# Altium PCB PCB1.PcbDoc
Units mil, origin at the board's own origin, x right, y up, seen from the top; angles counter-clockwise.
Board outline 1259.84 x 1574.8 mil, 2 copper layers (Top Layer, Bottom Layer); 39 components, 30 nets, 136 pads, 135 vias.
Unrouted connection lines stored in the file: 1.
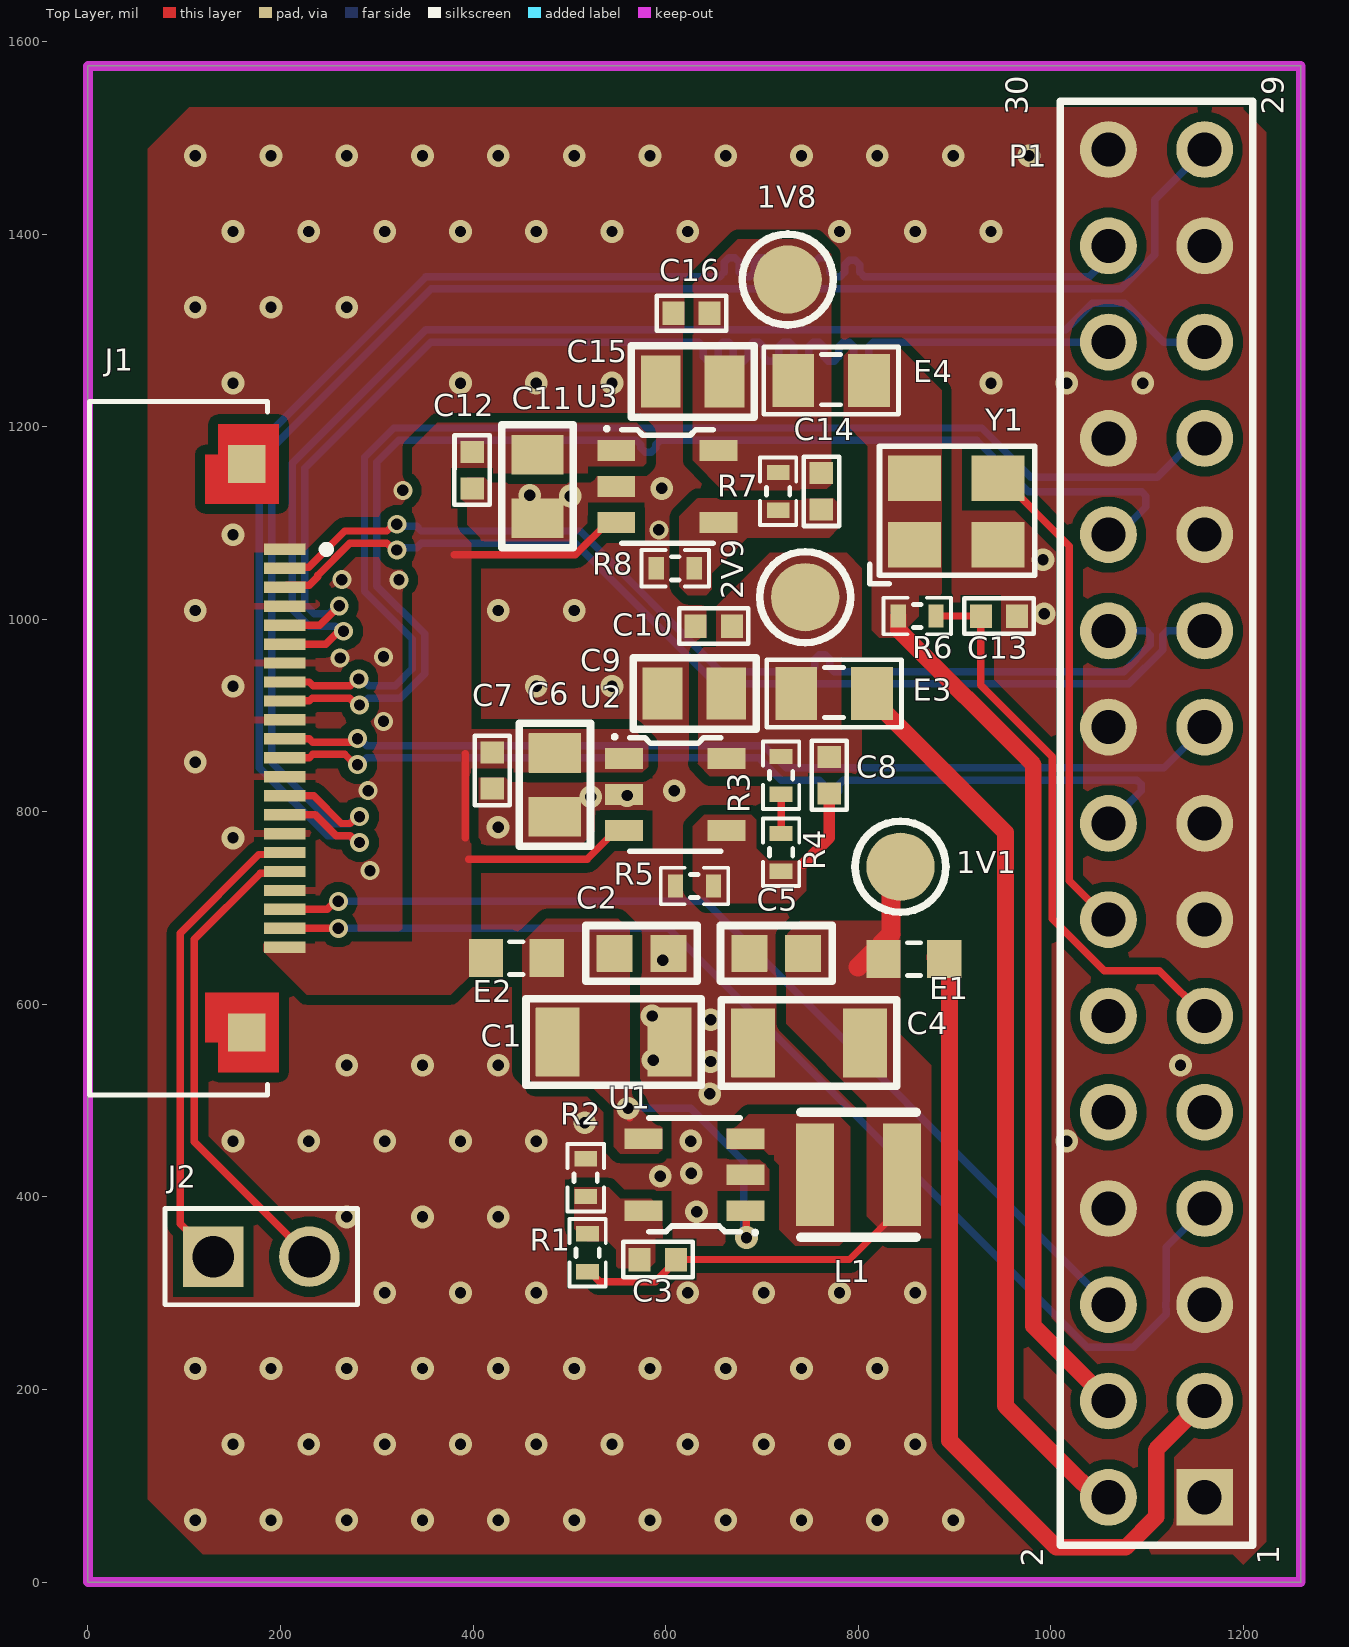
[diagram p0: Top Layer view]
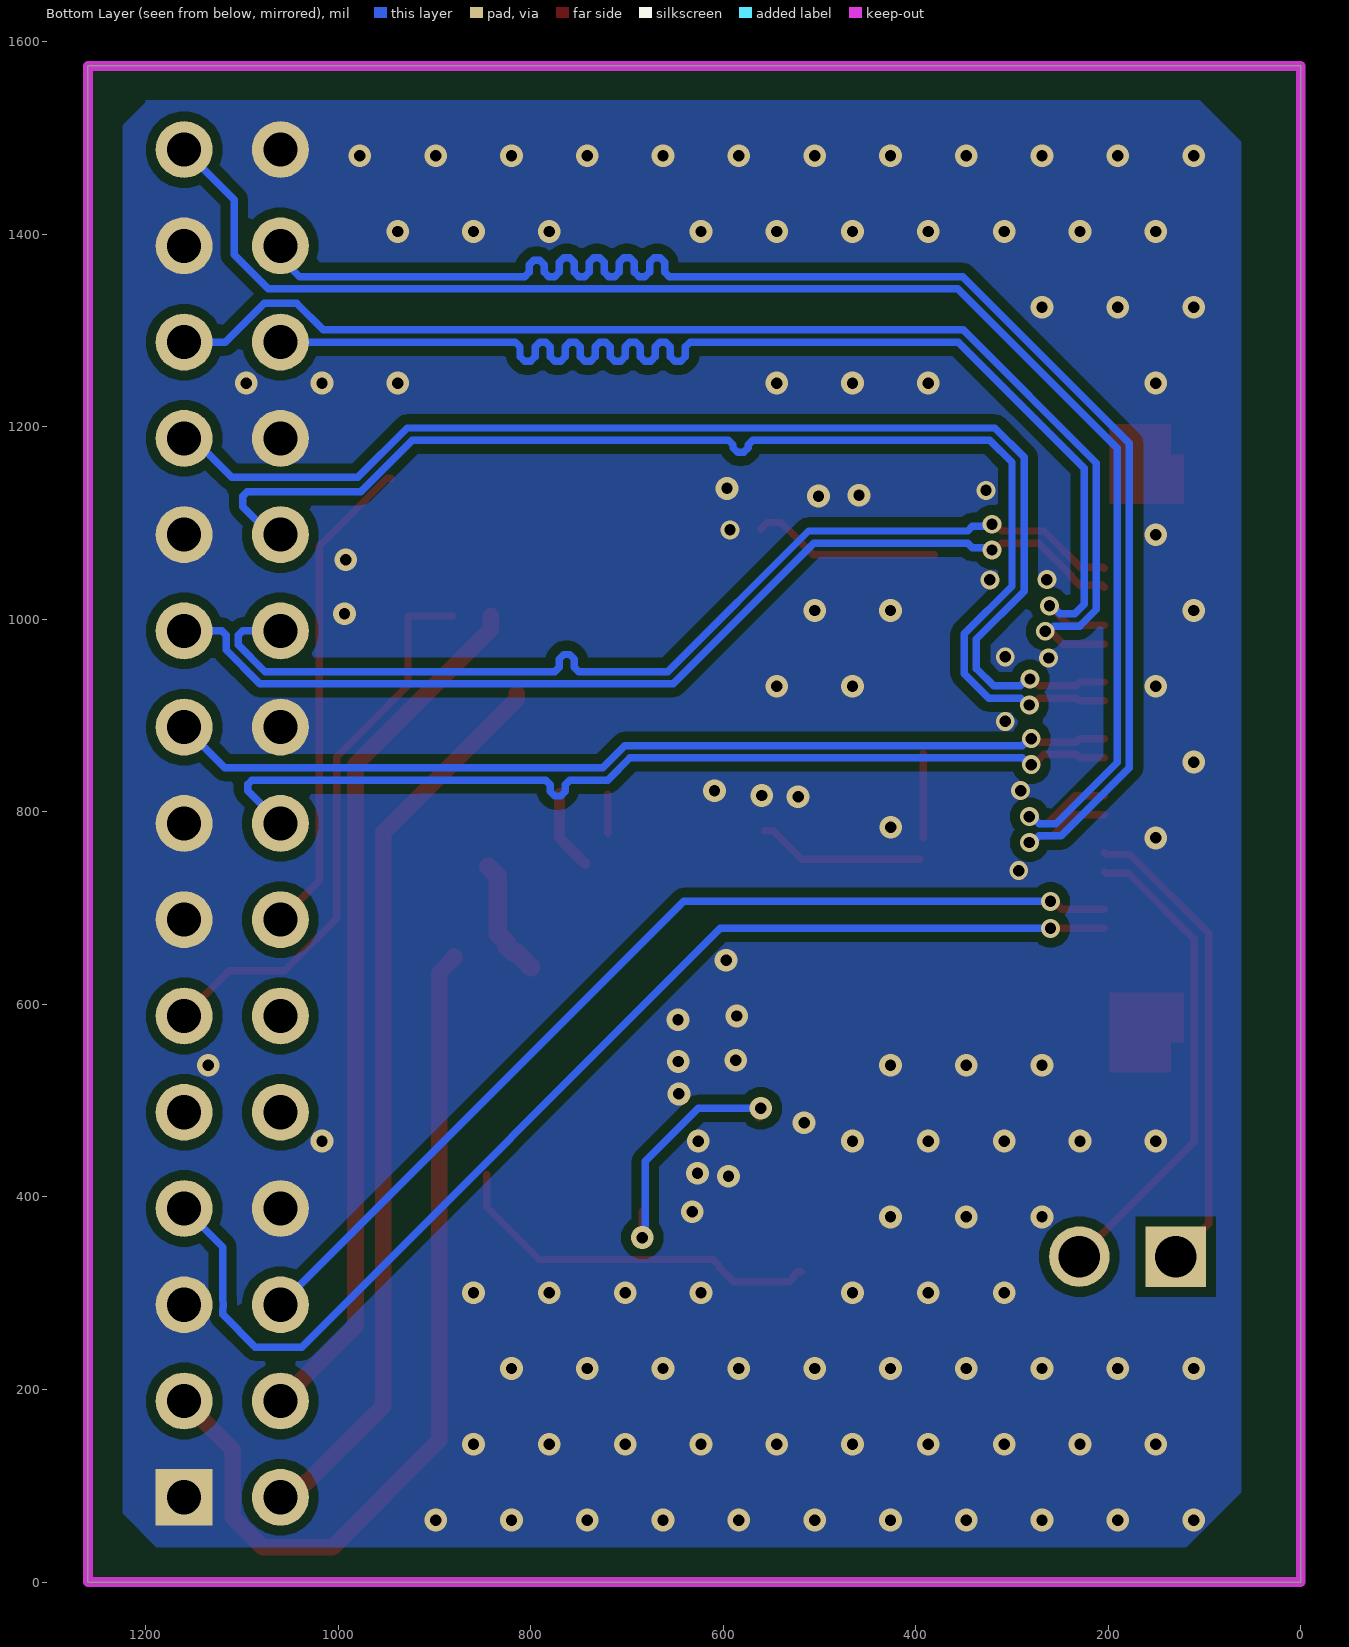
[diagram p1: Bottom Layer view, seen from below]
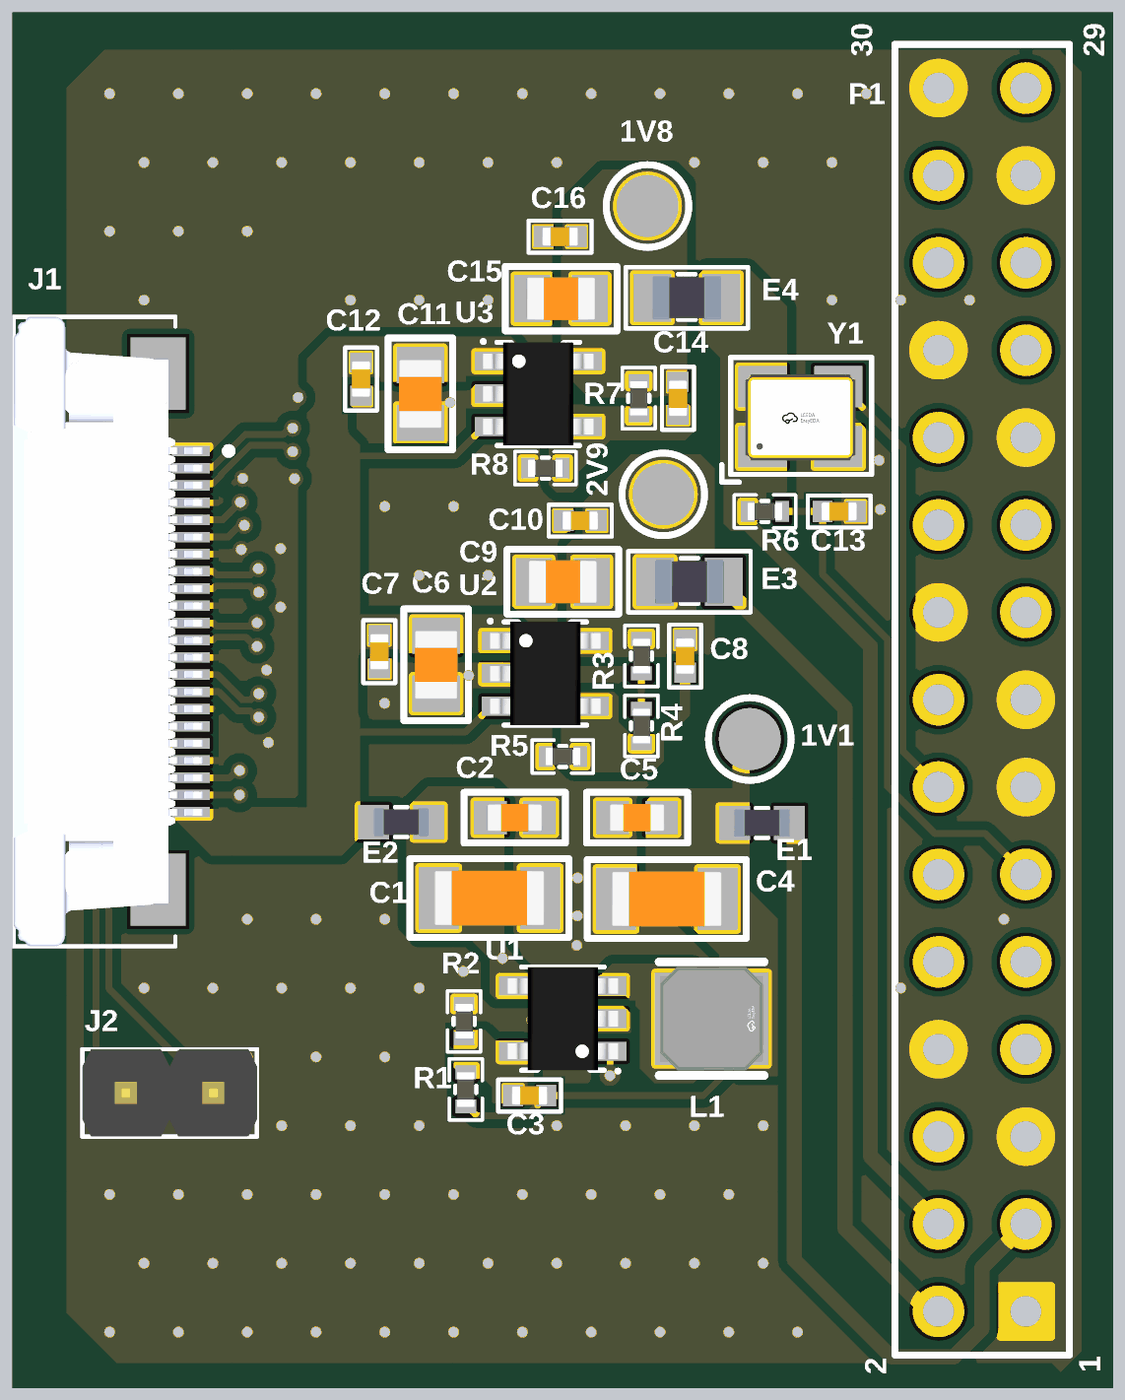
[diagram p2: 3D render of the assembled board from above, using the file's embedded part models]

## Layer stack, top to bottom
Top Solder: solder mask 0.4, Solder Resist, Dk 3.5
Top Layer: signal copper 1.4
Dielectric 1: dielectric 12.6, FR-4, Dk 4.8
Bottom Layer: signal copper 1.4
Bottom Solder: solder mask 0.4, Solder Resist, Dk 3.5

## Board outline
0,0 0,1574.8 1259.84,1574.8 1259.84,0

## Design rules (kind name [scope] priority, off if disabled: settings)
Clearance POLY [InPolygon] p1: gap=10 ignorepadtopadclearanceinfootprint=FALSE
Clearance [All] p2: gap=7.09 ignorepadtopadclearanceinfootprint=FALSE except(4.72: Arc-Arc Arc-Track Track-Track)
DiffPairsRouting [InDifferentialPairClass('MDC')] p1: maxlimit=5 minlimit=5 mostfreqgap=5 toplayer_minwidth=7.75 toplayer_maxwidth=7.75 toplayer_prefwidth=7.75 bottomlayer_minwidth=7.75 bottomlayer_maxwidth=7.75 bottomlayer_prefwidth=7.75 impedanceprofiledriven=TRUE impedanceprofileid={84AA8ECF-859C-4DF6-84D2-6CB03C06FCF8} impedanceprofilevalue=100.000000 maxuncoupledlength=500
MatchedLengths [InDifferentialPairClass('MDC')] p1: tolerance=9.84 checknetsindiffpair=TRUE checkdiffpairvsdiffpair=FALSE checkxsignals=FALSE checkothers=FALSE
MinimumSolderMaskSliver [All] p1: minsoldermaskwidth=0.39
PolygonConnect [All] p1: connectstyle=Direct reliefconductorwidth=10 reliefentries=4 polygonreliefangle="90 Angle" airgapwidth=10
RoutingVias [All] p1: holewidth=28 width=50 viastyle="Through Hole" minholewidth=28 minwidth=50 maxholewidth=28 maxwidth=50
SilkToSilkClearance [All] p1: silktosilkclearance=0.39
SilkToSolderMaskClearance [IsPad] p1: minsilkscreentomaskgap=0.39 clearancetoexposedcopper=TRUE
SolderMaskExpansion [All] p1: expansion=4 istentingtop=FALSE
Width [InNet('No Net') And OnLayer('Top Layer')] p1: maxlimit=196.85 minlimit=10 preferedwidth=12.04 bottomlayer_prefwidth=12.04 minimp=50.000000 maximp=50.000000 favimp=50.000000
26 further rules are at their usual default settings.

## Classes and differential pairs
net class 100R: MC_N MC_P MD1_N MD1_P MD2_N MD2_P MD3_N MD3_P MD4_N MD4_P
differential pair class MDC: MC MD1 MD2 MD3 MD4
differential pair MD4: +MD4_P -MD4_N
differential pair MD3: +MD3_P -MD3_N
differential pair MC: +MC_P -MC_N
differential pair MD2: +MD2_P -MD2_N
differential pair MD1: +MD1_P -MD1_N

## Components (designator, comment, footprint, x,y, rotation, side; value= is the part's Value field where it differs from the comment)
1V1 "TP" TP-SMD 844,743 r0 top
1V8 "TP" TP-SMD 726.93,1353 r90 top
2V9 "TP" TP-SMD 745,1023 r0 top
C1 "10uF 50V" CAPC_1206_N 545,563 r180 top
C2 "100nF" CAPC_0603_N 575,653 r180 top
C3 "22pF-50V" C0402 592,335 r0 top
C4 "10uF 50V" CAPC_1206_N 750,558 r0 top
C5 "100nF" CAPC_0603_N 715,653 r0 top
C6 "10uF - 16V" CAPC_0805_N 485,828 r90 top
C7 "100nF/4/16V" C0402 420,843 r90 top
C8 "100nF/4/16V" C0402 770,838 r90 top
C9 "10uF - 16V" CAPC_0805_N 630,923 r0 top
C10 "100nF/4/16V" C0402 650,993 r0 top
C11 "10uF - 16V" CAPC_0805_N 466.93,1138 r90 top
C12 "100nF/4/16V" C0402 399,1155 r90 top
C13 "100nF/4/16V" C0402 946.31,1003.45 r180 top
C14 "100nF/4/16V" C0402 761.93,1133 r90 top
C15 "10uF - 16V" CAPC_0805_N 628,1247 r0 top
C16 "100nF/4/16V" C0402 626.93,1318 r0 top
E1 "5A" 0603 858,647 r0 top
E2 "5A" 0603 445,648 r180 top
E3 "1K-1.5A" 0805 775,923 r0 top
E4 "1K-1.5A" 0805 771.93,1248 r0 top
J1 "F32Q-1A7H1-11022" AMPHENOL_F32Q-1A7H1-11022 94,866 r270 top
J2 "2P" JUMP-2.54-2PIN-M-TH 130,338 r0 top
L1 "2.2uH 2A" IND-3x3 755,423 r0 top
P1 "Header 15X2" HDR2X15 1160,88 r90 top
R1 "8.45K/4/1%" R0402 519,342 r90 top
R2 "10K/4/1%" R0402 517,420 r90 top
R3 "118K/4/1%" R0402 720,838 r270 top
R4 "100K/4/1%" R0402 720,758 r270 top
R5 "51.1K/4/1%" R0402 630,723 r180 top
R6 "10K/4/1%" R0402 861.31,1003.45 r0 top
R7 "226k/4/1%" R0402 716.93,1133 r270 top
R8 "100K/4/1%" R0402 610,1053 r180 top
U1 "ETA3409S2F" SOT-23-5 630,423 r180 top
U2 "TLV75801PDBVR" SOT-23-5 610,818 r0 top
U3 "TLV75801PDBVR" SOT-23-5 601.93,1138 r0 top
Y1 "24Mhz" SMD3225-4P 900,1113 r0 top

## Footprints (in the part's own frame and the unit in brackets; to place one, negate y for a bottom-side part, rotate by r counter-clockwise, add the part's x,y. Pads: shape width x height; smd on the part's side, far side on the other; paste and mask are expansions set on the pad)
0603 [mm]
  rect 0.9x1 smd: 1(-0.8,0) 2(0.8,0)
  silkscreen extent -0.18,-0.43 0.18,0.43, body extent -0.8,-0.4 0.8,0.4, height 0.8
0805 [mm]
  rect 1.1x1.397 smd: 1(-1,0) 2(1,0)
  silkscreen extent -1.78,-0.89 1.78,0.89, body extent -1,-0.63 1,0.62, height 0.85
AMPHENOL_F32Q-1A7H1-11022 [mm]
  rect 0.3x1.1 smd: 1(-5.25,2.8) 2(-4.75,2.8) 3(-4.25,2.8) 4(-3.75,2.8) 5(-3.25,2.8) 6(-2.75,2.8) 7(-2.25,2.8) 8(-1.75,2.8) 9(-1.25,2.8) 10(-0.75,2.8) 11(-0.25,2.8) 12(0.25,2.8) 13(0.75,2.8) 14(1.25,2.8) 15(1.75,2.8) 16(2.25,2.8) 17(2.75,2.8) 18(3.25,2.8) 19(3.75,2.8) 20(4.25,2.8) 21(4.75,2.8) 22(5.25,2.8)
  rect 1x1 smd paste-1 mask+0: SH1(-7.5,1.8) SH2(7.5,1.8)
  Top Layer region: -6.45,0.7 -7.75,0.7 -7.75,1.05 -8.55,1.05 -8.55,2.65 -6.45,2.65
  Top Layer region: 8.55,1.05 7.75,1.05 7.75,0.7 6.45,0.7 6.45,2.65 8.55,2.65
  silkscreen extent -9.15,-2.35 9.15,4, body extent -9.15,-2.35 9.15,3.15, height 2.05
C0402 [mm]
  rect 0.58x0.62 smd mask+0.05: 1(-0.48,0) 2(0.48,0)
  silkscreen extent -0.92,-0.47 0.91,0.47, body extent -0.53,-0.28 0.53,0.28, height 0.55
CAPC_0603_N [mm]
  rrect2% 0.95x0.97 smd: 1(-0.71,0) 2(0.71,0)
  silkscreen extent -1.47,-0.74 1.47,0.74, body extent -0.8,-0.4 0.8,0.4, height 0.8
CAPC_0805_N [mm]
  rrect2% 1.05x1.38 smd: 1(-0.84,0) 2(0.84,0)
  silkscreen extent -1.62,-0.94 1.63,0.94, body extent -1,-0.62 1,0.63, height 0.95
CAPC_1206_N [mm]
  rrect2% 1.16x1.82 smd: 1(-1.5,0.051) 2(1.45,0.051)
  silkscreen extent -2.34,-1.09 2.29,1.19, body extent -1.63,-0.75 1.57,0.85, height 1.15
HDR2X15 [mm] "Connector; Header; 15x2 Position"
  rect 1.5x1.5 hole 0.9: 1(0,0)
  round 1.5 hole 0.9: 2(0,2.54) 3(2.54,0) 4(2.54,2.54) 5(5.08,0) 6(5.08,2.54) 7(7.62,0) 8(7.62,2.54) 9(10.16,0) 10(10.16,2.54) 11(12.7,0) 12(12.7,2.54) 13(15.24,0) 14(15.24,2.54) 15(17.78,0) 16(17.78,2.54) 17(20.32,0) 18(20.32,2.54) 19(22.86,0) 20(22.86,2.54) 21(25.4,0) 22(25.4,2.54) 23(27.94,0) 24(27.94,2.54) 25(30.48,0) 26(30.48,2.54) 27(33.02,0) 28(33.02,2.54) 29(35.56,0) 30(35.56,2.54)
  silkscreen extent -1.27,-1.27 36.83,3.81
IND-3x3 [mm]
  rect 1x2.7 smd: 1(0,0) 2(2.3,0)
  silkscreen extent -0.37,-1.65 2.67,1.65, body extent -0.35,-1.5 2.65,1.5, height 1.51
JUMP-2.54-2PIN-M-TH [mm] "2 pins, 1 row, straight, gold plating"
  rect 1.6x1.6 hole 1.1: 1(0,0)
  round 1.6 hole 1.1: 2(2.54,0)
  silkscreen extent -1.27,-1.27 3.81,1.27, body extent -1.27,-1.27 3.81,1.27, height 8.54
R0402 [mm]
  rect 0.4x0.6 smd: 1(-0.5,0) 2(0.5,0)
  silkscreen extent -0.89,-0.48 0.89,0.48, body extent -0.5,-0.25 0.5,0.25, height 0.36
SMD3225-4P [mm]
  rect 1.4x1.2 smd: 1(-1.049,-0.901) 2(1.151,-0.901) 3(1.151,0.85) 4(-1.049,0.85)
  silkscreen extent -2.24,-1.93 2.12,1.7, body extent -1.55,-1.3 1.65,1.2, height 0.81
SOT-23-5 [mm]
  rect 1x0.55 smd: 1(-1.35,0.95) 2(-1.35,0) 3(-1.35,-0.95) 4(1.35,-0.95) 5(1.35,0.95)
  silkscreen extent -1.65,-1.5 1.2,1.57, body extent -1.6,-1.5 1.6,1.5, height 0.92
TP-SMD [mm] "Test Point SMD"
  round 1.8 smd: 1(0,0)
  silkscreen extent -1.2,-1.2 1.2,1.2

## Part data
C1 C4: library part TCC1206X5R106K500HT, "10uF ±10% 50V Ceramic Capacitor X5R 1206", Manufacture=CCTC, Tolerance=±10%, Category=Capacitor, Detailed Value="10uF 50V", Mounting type=SMD, Partnumber=TCC1206X5R106K500HT
C2 C5: library part CC0603KRX7R9BB104, "50V 100nF X7R ±10% 0603 Multilayer Ceramic Capacitors MLCC - SMD/SMT ROHS", Manufacture=Yageo, Tolerance=±10%, Category=Capacitor, Creator=Hainv, Detailed Value=100nF, Mounting type=SMD, Partnumber=CC0603KRX7R9BB104, Supplier=LCSC
C3: library part CC0402JRNPO9BN220, "22pF ±5% 50V Ceramic Capacitor NP0 0402", Manufacture=Yageo, Category=Capacitor, Creator=Hainv, Detailed Value=22pF-50V, Mounting type=SMD, Partnumber=CC0402JRNPO9BN220, Supplier=LCSC
C6 C9 C11 C15: library part C0805X5R106K160NT, "CAP CER 10uF 16V X5R 0805", Detailed Value="10uF - 16V - 0805", Manufacture=Hottech, Category=Capacitor, Creator=ThangND, Mounting type=SMD, Partnumber=C0805X5R106K160NT, PROJECT=KHO
C7 C8 C10 C12 C13 C14 C16: library part CC0402KRX7R7BB104, "16V 100nF X7R ±10% 0402 Multilayer Ceramic Capacitors MLCC - SMD/SMT ROHS", Manufacture=Yageo, Tolerance=±10%, Category=Capacitor, Creator=Hainv, Detailed Value=100nF/4/16V, Mounting type=SMD, Partnumber=CC0402KRX7R7BB104, Supplier=LCSC
E1 E2: library part YI160808U100-5R0T, "10mΩ ±25% 10Ω@100MHz 0603 Ferrite Beads and Chips RoHS", Manufacture=YJYCOIN, Category="Ferrite Bead", Creator=Hainv, Detailed Value=5A, Mounting type=SMD, Partnumber=YI160808U100-5R0T, Supplier=LCSC
E3 E4: library part UPZ2012E102-1R5TF, "FERRITE BEAD 1 KOHM 0805 1.5A", Manufacture=Sunlord, Category="Ferrite Bead", Creator=Tunn, Detailed Value=1K-1.5A, Mounting type=SMD, Partnumber=UPZ2012E102-1R5TF
J1: "Flex Connector, 0.50mm Pitch, Height 2.00mm, Right angle, Slider type, ZIF, Upper contact, 22 position , Without MYLAR", Package=None, Check_prices=https://www.snapeda.com/parts/F32Q-1A7H1-11022/Amphenol+FCI/view-part/?ref=eda, MF="Amphenol ICC (FCI)", MP=F32Q-1A7H1-11022, SnapEDA_Link=https://www.snapeda.com/parts/F32Q-1A7H1-11022/Amphenol+FCI/view-part/?ref=snap
J2: library part X6521WV-2x01H-C60D30, "2P 2x1P Gold Brass -40℃~+105℃ Pin Header Black 2.54mm 2.5mm 250V 2 3A 2.54mm Through Hole,P=2.54mm Headers, Male Pins RoHS", Manufacture="XKB Connection", Category=Connector, Creator=Hainv, Detailed Value=2P, Mounting type=TH, Partnumber=X6521WV-2x01H-C60D30, Supplier=LCSC
L1: library part ZNR3015ST2R2M, "2A 2.2uH Magnetic Shielded Inductor ±20% 2A 60mΩ SMD,3x3mm Fixed Inductors RoHS", Manufacture=ZE, Category=Inductor, Creator=Hainv, Detailed Value="2.2uH 2A", Mounting type=SMD, Partnumber=ZNR3015ST2R2M, Supplier=LCSC
P1: "Header, 15-Pin, Dual row", LatestRevisionDate=17-Jul-2002, LatestRevisionNote="Re-released for DXP Platform.", Publisher="Altium Limited"
R1: library part RC0402FR-078K45L, "62.5mW 8.45kΩ 50V Thick Film Resistor ±100ppm/℃ ±1% 0402 Chip Resistor - Surface Mount RoHS", Manufacture=Yageo, Category=Resistor, Creator=Hainv, Detailed Value=8.45K/4/1%, Mounting type=SMD, Partnumber=RC0402FR-078K45L, Supplier=LCSC
R2 R6: library part RC0402FR-0710KL, "62.5mW Thick Film Resistor 50V ±100ppm/℃ ±1% 10kΩ 0402 Chip Resistor - Surface Mount ROHS", Manufacture=Yageo, Tolerance=±1%, Category=Resistor, Creator=Hainv, Detailed Value=10K/4/1%, Mounting type=SMD, Partnumber=RC0402FR-0710KL, Supplier=LCSC
R3: library part RC0402DR-07118KL, "62.5mW 118kΩ 50V Thick Film Resistor ±100ppm/℃ ±0.5% 0402 Chip Resistor - Surface Mount RoHS", Manufacture=Yageo, Category=Resistor, Creator=Hainv, Detailed Value=118K/4/1%, Mounting type=SMD, Partnumber=RC0402DR-07118KL, Supplier=LCSC
R4 R8: library part RC0402FR-07100KL, "62.5mW Thick Film Resistor 50V ±100ppm/℃ ±1% 100kΩ 0402 Chip Resistor - Surface Mount ROHS", Manufacture=Yageo, Tolerance=±1%, Category=Resistor, Creator=Hainv, Detailed Value=100K/4/1%, Mounting type=SMD, Partnumber=RC0402FR-07100KL, Supplier=LCSC
R5: library part RC0402FR-0751K1L, "51.1kΩ 62.5mW 50V Thick Film Resistor ±100ppm/℃ ±1% 0402 Chip Resistor - Surface Mount RoHS", Manufacture=Yageo, Category=Resistor, Creator=Hainv, Detailed Value=51.1K/4/1%, Mounting type=SMD, Partnumber=RC0402FR-0751K1L, Supplier=LCSC
R7: library part AC0402FR-07226KL, "226kΩ 62.5mW 50V Thick Film Resistor ±100ppm/℃ ±1% 0402 Chip Resistor - Surface Mount RoHS", Detailed Value=226K/4/1%, Manufacture=Yageo, Category=Resistor, Creator=Hainv, Mounting type=SMD, Partnumber=AC0402FR-07226KL, Supplier=LCSC
U1: "Buck 1MHz Adjustable 600mV~7.3V 3A SOT23-5 Voltage Regulators - DC DC Switching Regulators RoHS", Manufacture=etasolution, Category=IC, Creator=Hainv, Detailed Value=ETA3409S2F, Mounting type=SMD, Partnumber=ETA3409S2F, Supplier=LCSC
U2 U3: "500mA, low IQ, high precision, adjustable ultra-low dropout voltage regulator with enable function", Manufacture=TI, Category=IC, Creator=Hainv, Detailed Value=TLV75801PDBVR, Mounting type=SMD, Partnumber=TLV75801PDBVR, Supplier=LCSC
Y1: library part 1631-24003-BTKEYA, "1.8V 10mA ±30ppm CMOS 24MHz SMD3225-4P Crystal Oscillators ROHS", Manufacture=Interquip, Category=Crystal, Creator=Hainv, Detailed Value=24Mhz, Mounting type=SMD, Partnumber=1631-24003-BTKEYA, Supplier=LCSC
1V1 1V8 2V9: Category=Connector, Creator=Quyen.nv, Detailed Value=TP, Partnumber=TP

## Via types
v1: diameter 23.62, hole 11.81, Top Layer to Bottom Layer, tented top, 92 vias
v2: diameter 23.62, hole 11.81, Top Layer to Bottom Layer, tented both sides, 22 vias
v3: diameter 19.68, hole 11.81, Top Layer to Bottom Layer, tented both sides, 21 vias

## Nets (pads, with @x,y where several pads share a name; then routed paths per layer and width w, separated by ;. In a path a pad name is that pad's centre, name@x,y a point inside that pad or via, vN(x,y) a via of type N, cw(c..) or ccw(c..) an arc to the next point about the centre after c; other vN are vias at no path point)
+1V1: E1.2 P1.3 | length 924.4
  Top Layer w17.32: E1.2@879.5,650 879.5,648.03 895,632.53 895,147 1006,36 1078,36 1109.55,67.55 1109.55,137.55 P1.3
+1V8: E4.2 P1.4 R6.1 Y1.1 Y1.4 | length 905.9
  Top Layer w17.32: R6.1 841.62,989.38 982,849 982,266 P1.4
+2V9: E3.2 P1.2 | length 943.8
  Top Layer w17.32: E3.2 814.37,917.15 953,778.52 953,183 1032.07,103.93 1032.78,103.93 1048.71,88 P1.2
+3V3: C6.2 C7.2 C11.2 C12.2 E2.2 J1.22 U2.1 U2.3 U3.1 U3.3 | length 458.2
  Top Layer w7.75: 380.5,1067 506.32,1067 539.92,1100.6 U3.3 554.05,1100.6 U3.3@561,1093.65 ; 392,772.91 392,860.5 ; 395.75,751 518.39,751 547.99,780.6 U2.3
GND: C1.1 C2.1 C4.1 C5.1 C6.1 C7.1 C9.1 C10.1 C11.1 C12.1 C13.1 C15.1 C16.1 J1.1 J1.4 J1.7 J1.10 J1.13 J1.16 J1.19 P1.1 P1.5 P1.8 P1.13 P1.15 P1.18 P1.21 P1.24 P1.27 P1.30 R2.2 R5.2 R8.2 U1.2 U2.2 U3.2 Y1.2
  other v1: 111.31,64.29 190.05,64.29 268.79,64.29 347.53,64.29 426.27,64.29 505.01,64.29 583.75,64.29 662.49,64.29 741.23,64.29 819.97,64.29 898.71,64.29 150.68,143.03 229.42,143.03 308.16,143.03 386.9,143.03 465.64,143.03 544.38,143.03 623.12,143.03 701.86,143.03 780.6,143.03 859.34,143.03 111.31,221.77 190.05,221.77 268.79,221.77 347.53,221.77 426.27,221.77 505.01,221.77 583.75,221.77 662.49,221.77 741.23,221.77 819.97,221.77 308.16,300.51 386.9,300.51 465.64,300.51 623.12,300.51 701.86,300.51 780.6,300.51 859.34,300.51 268.79,379.26 347.53,379.26 426.27,379.26 150.68,458 229.42,458 308.16,458 386.9,458 465.64,458 1016.82,458 268.79,536.74 347.53,536.74 426.27,536.74 1134.93,536.74 150.68,772.96 111.31,851.7 150.68,930.44 465.64,930.44 544.38,930.44 111.31,1009.18 426.27,1009.18 505.01,1009.18 150.68,1087.92 150.68,1245.4 386.9,1245.4 465.64,1245.4 544.38,1245.4 938.08,1245.4 1016.82,1245.4 1095.56,1245.4 111.31,1324.14 190.05,1324.14 268.79,1324.14 150.68,1402.88 229.42,1402.88 308.16,1402.88 386.9,1402.88 465.64,1402.88 544.38,1402.88 623.12,1402.88 780.6,1402.88 859.34,1402.88 938.08,1402.88 111.31,1481.62 190.05,1481.62 268.79,1481.62 347.53,1481.62 426.27,1481.62 505.01,1481.62 583.75,1481.62 662.49,1481.62 741.23,1481.62 819.97,1481.62 898.71,1481.62 977.45,1481.62
  other v2: 632.22,384.75 594.45,421.47 626.72,424.68 626,458 516,477 646,507 646.72,540.68 587,542 647,584 586,588 597,646 426,784 522.19,815.84 560,817 609,822 993.36,1005.68 992,1062 501,1128 459,1129 596,1136
  other v3: 293,739 291,822 307,894 261.98,959.84 307,961 263.73,1041.27 323,1041 593,1093 327,1134
MC_N: J1.8 P1.23 | length 1311.2
  Top Layer w7.75: J1.8 229.77,934.9 233.76,930.9 272.48,930.9 279.63,938.06 v3(281.37,938.06)
  Bottom Layer w7.75: v3(281.37,938.06) 284.37,938.06 291.52,930.9 319,930.9 337,948.9 337,979.54 287.25,1029.29 287.25,1168.28 317.72,1198.75 928.28,1198.75 979.52,1147.51 1017.78,1147.51 1110.51,1147.51 1151,1188 P1.23
MC_P: J1.9 P1.22 | length 1311.3
  Top Layer w7.75: J1.9 229.77,915.21 232.71,918.15 271.85,918.15 279,911 v3(282,911)
  Bottom Layer w7.75: v3(282,911) 283.73,911 290.89,918.15 324.28,918.15 349.75,943.62 349.75,984.82 300,1034.58 300,1163 323,1186 550,1186 569.5,1186 574.19,1181.31 574.19,1178.41 578.88,1173.73 585.13,1173.73 589.82,1178.41 589.82,1181.31 594.5,1186 663,1186 923,1186 976.52,1132.48 1094.46,1132.48 1099,1127.94 1099,1117 1070,1088 P1.22
MCLK: P1.14 Y1.3 | length 508.3
  Top Layer w7.75: Y1.3 949.25,1146.45 1019.51,1076.18 1019.51,728.49 P1.14
MD1_N: J1.2 P1.20 | length 1073.2
  Top Layer w7.75: J1.2 205.46,1054.24 229.24,1054.24 266.76,1091.76 310.57,1091.76 317.58,1098.77 v3(320.81,1098.77)
  Bottom Layer w7.75: v3(320.81,1098.77) 323.09,1096.49 341.43,1096.49 346.15,1091.76 511.38,1091.76 657.39,945.75 746.19,945.75 750.07,945.75 754.76,950.44 754.76,958.79 759.44,963.48 765.7,963.48 770.38,958.79 770.38,950.44 775.07,945.75 847,945.75 885.81,945.75 1075.96,945.75 1103.62,973.42 1103.62,983.46 1099.08,988 P1.20
MD1_P: J1.3 P1.19 | length 1073.5
  Top Layer w7.75: J1.3 206.27,1035.35 229.64,1035.35 238.61,1044.32 238.61,1045.57 272.04,1079.01 310.57,1079.01 317.58,1072 v3(320.81,1072)
  Bottom Layer w7.75: v3(320.81,1072) 323.09,1074.28 341.43,1074.28 346.15,1079.01 506.09,1079.01 652.1,933 835,933 1081.24,933 1116.38,968.14 1116.38,983.46 1120.92,988 P1.19
MD2_N: J1.5 P1.26 | length 1309.4
  Top Layer w7.75: J1.5 240.95,993.95 v3(261,1014)
  Bottom Layer w7.75: v3(261,1014) 258.69,1014 250.49,1005.8 234.93,1005.8 225,1015.73 225,1157 356,1288 615,1288 634.5,1288 639.19,1283.31 639.19,1273 643.88,1268.32 650.13,1268.32 654.82,1273 654.82,1283.31 659.5,1288 665.76,1288 670.44,1283.31 670.44,1273 675.13,1268.32 681.38,1268.32 686.07,1273 686.07,1283.31 690.76,1288 697.01,1288 701.7,1283.31 701.7,1273 706.38,1268.32 712.63,1268.32 717.32,1273 717.32,1283.31 722.01,1288 728.26,1288 732.95,1283.31 732.95,1273 737.64,1268.32 743.89,1268.32 748.57,1273 748.57,1283.31 753.26,1288 759.51,1288 764.2,1283.31 764.2,1273 768.89,1268.32 775.14,1268.32 779.83,1273 779.83,1283.31 784.52,1288 790.77,1288 795.45,1283.31 795.45,1273 800.14,1268.32 806.39,1268.32 811.08,1273 811.08,1283.31 815.77,1288 868,1288 P1.26
MD2_P: J1.6 P1.25 | length 1314.7
  Top Layer w7.75: J1.6 246.98,974.27 260.32,987.61 v3(265.48,987.61)
  Bottom Layer w7.75: v3(265.48,987.61) 262.25,987.61 256.81,993.05 229.64,993.05 212.25,1010.45 212.25,1162.28 350.72,1300.75 1015.49,1300.75 1043.23,1328.49 1076.77,1328.49 1117.26,1288 P1.25
MD3_N: J1.11 P1.17 | length 988.7
  Top Layer w7.75: J1.11 229.77,875.84 233.23,872.38 276.38,872.38 v3(280,876)
  Bottom Layer w7.75: v3(280,876) 282.42,876 289.55,868.88 702.14,868.88 725.26,845.75 910.94,845.75 1094.78,845.75 1117.75,845.75 P1.17
MD3_P: J1.12 P1.16 | length 986.6
  Top Layer w7.75: J1.12 229.77,856.16 233.23,859.62 266.95,859.62 277.58,849 v3(280,849)
  Bottom Layer w7.75: v3(280,849) 282.42,849 289.55,856.12 696.86,856.12 719.98,833 740,833 759.5,833 764.19,828.31 764.19,821.18 768.88,816.5 775.13,816.5 779.82,821.18 779.82,828.31 784.5,833 835,833 916.22,833 1089.5,833 1094.04,828.46 1094.04,822.04 P1.16
MD4_N: J1.14 P1.29 | length 1670.8
  Top Layer w7.75: J1.14 234.35,816.79 263.2,787.94 272.39,787.94 279.46,795 v3(282,795)
  Bottom Layer w7.75: v3@282,794.71 278.49,794.71 271.52,787.75 254.28,787.75 190.75,851.28 190.75,1177.72 356.36,1343.33 1072.59,1343.33 1107.92,1378.65 1107.92,1435.92 P1.29
MD4_P: J1.15 P1.28 | length 1673.2
  Top Layer w7.75: J1.15 236,797.1 257.91,775.18 272.39,775.18 279.46,768.12 v3(282,768.12)
  Bottom Layer w7.75: v3(282,768.12) 278.77,768.12 271.89,775 249,775 178,846 178,1183 351.08,1356.08 652.35,1356.08 656.23,1356.08 660.91,1360.77 660.91,1371.08 665.6,1375.77 671.85,1375.77 676.54,1371.08 676.54,1360.77 681.23,1356.08 687.48,1356.08 692.17,1360.77 692.17,1371.08 696.85,1375.77 703.11,1375.77 707.79,1371.08 707.79,1360.77 712.48,1356.08 718.73,1356.08 723.42,1360.77 723.42,1371.08 728.11,1375.77 734.36,1375.77 739.05,1371.08 739.05,1360.77 743.73,1356.08 749.98,1356.08 754.67,1360.77 754.67,1371.08 759.36,1375.77 765.61,1375.77 770.3,1371.08 770.3,1360.77 774.99,1356.08 781.24,1356.08 785.92,1360.77 785.92,1368.23 790.61,1372.91 796.86,1372.91 801.55,1368.23 801.55,1360.77 806.24,1356.08 836.21,1356.08 1040.14,1356.08 1060,1375.94 P1.28
Net1V1_1: 1V1.1 C3.2 C4.2 C5.2 E1.1 L1.2 R1.1 | length 523.2
  Top Layer w7.75: R1.1 522.93,322.31 526.93,318.31 526.93,316.37 531.47,311.83 589.06,311.83 603.36,326.13 603.36,327.46 C3.2 791.01,335 845.55,389.54 L1.2
  Top Layer w19.68: 799.72,638.72 814.74,653.74 818.27,653.74 824.38,659.84 824.38,663.38 834.21,673.21 834.21,733.21 1V1.1
Net1V8_1: 1V8.1 C14.2 C15.2 C16.2 E4.1 R7.1 U3.5
Net2V9_1: 2V9.1 C8.2 C9.2 C10.2 E3.1 R3.1 U2.5
NetC1_2: C1.2 C2.2 E2.1 U1.1 U1.4 | length 262.3
  Top Layer w7.75: v2(561,492) 563,490 v2@563,482 ; U1.1 684,384.75 v2(684,357.77)
  Bottom Layer w7.75: v2(561,492) 626,492 680.96,437.04 680.96,360.81 v2(684,357.77)
NetC3_1: C3.1 R1.2 R2.1 U1.5
NetC8_1: C8.1 R4.2 R5.1 U2.4 | length 83.6
  Top Layer w11.81: 743.5,746.5 770,773 C8.1
NetC14_1: C14.1 R7.2 R8.1 U3.4
NetJ1_17: J1.17 J2.1 | length 493.3
  Top Layer w7.75: J2.1 95.76,372.24 95.76,673.93 177.53,755.7 202.21,755.7 J1.17
NetJ1_18: J1.18 J2.2 | length 502
  Top Layer w7.75: J1.18 202.21,736.02 178.83,736.02 110.6,667.79 110.6,457.4 J2.2
NetL1_1: L1.1 U1.3
NetR3_2: R3.2 R4.1 | length 40.6
  Top Layer w7.75: R4.1 R3.2
SCL: J1.20 P1.6 | length 1032.8
  Top Layer w7.75: J1.20 248.45,698.68 256.77,707 v3(260,707)
  Bottom Layer w7.75: v3(260,707) 641,707 P1.6
SDA: J1.21 P1.7 | length 1236.6
  Top Layer w7.75: J1.21 v3(260,679)
  Bottom Layer w7.75: v3(260,679) 603,679 1038,244 1086,244 1119.99,277.99 1119.99,281.2 1119.99,281.78 cw(c1160,288) 1119.93,293.8 ccw(c1112.25,294.86) 1120,294.86 1120,348 P1.7
XCLR: C13.2 P1.11 R6.2 | length 591.8
  Top Layer w7.75: R6.2 C13.2 927.41,931.34 1001.62,857.13 1001.62,689.11 1055.74,635 1113,635 P1.11
pads on no net: J1.SH1 J1.SH2 P1.9 P1.10 P1.12

## Polygon pours and split planes (outlines as drawn)
GND on Top Layer "NONET_L-01_P-001" (solid, remove dead copper, pour order 20): 62,1489 105,1532 1200,1532 1200,1530 1224,1506 1224,42 1200,18 1189,29 119,29 62,86
+3V3 on Top Layer "NONET_L-01_P-001" (solid, remove dead copper, pour order 18): 182,666.01 182,655 227.2,609.8 376.8,609.8 398,631 398,1190 388,1200 388,1204 363,1204 337,1178 337,665
NetC3_1 on Top Layer "NONET_L-01_P-001" (solid, remove dead copper, pour order 16): 517.5,354.5 518,354 540,354 549,345 549,328 558,319 588,319 597,328 597,386 585,398 553,398 541,410 505,410 505,367
NetC1_2 on Top Layer "NONET_L-01_P-001" (solid, remove dead copper, pour order 15): 595.62,445 603.62,453 603.62,478.31 563,518.94 563,677 551,689 476,689 451,664 451,530 464,517 464,515 523,515 545,493 546,493 546,452 553,445
Net1V1_1 on Top Layer "NONET_L-01_P-001" (solid, remove dead copper, pour order 14): 725,670 725,672 740,687 832,687 832,686 844,674 844,569 876,537 876,357 832,357 809,380 809,496 724,581 724,671
NetL1_1 on Top Layer "NONET_L-01_P-001" (solid, remove dead copper, pour order 13): 660,476 670,486 779,486 792,473 792,361 780,349 735,349 718,366 718,433 702,449 667.5,449 660,456.5
GND on Top Layer "NONET_L-01_P-001" (solid, remove dead copper, pour order 12): 575,675 585,685 700,685 715,670 715,518 704,518 660,474 660,439 661,439 665,435 665,411 664,411 658,405 658,369 651,362 613,362 613,365 601,377 601,484 595,484 575,504
+1V8 on Top Layer "NONET_L-01_P-001" (solid, remove dead copper, pour order 11): 785,1274 794,1283 842,1283 887,1238 887,1027 841,981 822,981 810,993 810,1180 785,1205
GND on Top Layer "NONET_L-01_P-001" (solid, remove dead copper, pour order 10): 394,1150 399,1155 565,1155 576,1166 576,1344.89 630,1344.89 630,1028 613,1011 587,1011 587,1016 579,1024 582,1027 582,1113 576,1119 530,1119 512,1101 512,1083 511,1083 503,1075 417,1075 394,1098
GND on Top Layer "NONET_L-01_P-001" (solid, remove dead copper, pour order 8): 397,834 402,839 568,839 579,850 579,1028.89 633,1028.89 633,712 616,695 590,695 590,700 582,708 585,711 585,797 579,803 533,803 515,785 515,767 514,767 506,759 420,759 397,782
NetC8_1 on Top Layer "NONET_L-01_P-001" (solid, remove dead copper, pour order 7): 628,785 640,797 689,797 694,792 694,762 707,749 741,749 746,744 746,718 733,705 642,705 628,719
+3V3 on Top Layer "NONET_L-01_P-001" (solid, remove dead copper, pour order 6): 392,886 567,886 582,871 582,847 576,841 392,841
Net2V9_1 on Top Layer "NONET_L-01_P-001" (solid, remove dead copper, pour order 5): 650,1011 708,1069 788,1069 804,1053 804,846 795,837 646,837 633,850 634,851 634,965 650,981
NetC14_1 on Top Layer "NONET_L-01_P-001" (solid, remove dead copper, pour order 3): 633,1126 774,1126 780,1120 780,1095 770,1085 685,1085 648,1048 648,1031 642,1025 623,1025 614,1034 614,1107
+3V3 on Top Layer "NONET_L-01_P-001" (solid, remove dead copper, pour order 1): 388,1204 570,1204 580,1194 580,1162 570,1152 391,1152 379,1164 379,1195 379,1164 379,1195
Net1V8_1 on Top Layer "NONET_L-01_P-001" (solid, remove dead copper, pour order 0): 628,1348 675,1395 756,1395 772,1379 772,1140 766,1134 659,1134 628,1165
GND on Bottom Layer "NONET_L-01_P-001" (solid, remove dead copper, pour order 21): 61.78,1496.26 104.78,1539.26 1199.78,1539.26 1199.78,1537.26 1223.78,1513.26 1223.78,71.26 1188.78,36.26 118.78,36.26 61.78,93.26

## Keep-outs
Keep-Out Layer:
  the board outline again, w10

## Text inside footprints (layer, text, board x,y; h text height)
P1: Top Overlay "30" at 984,1524 h39.37 r90; Top Overlay "29" at 1250,1524 h39.37 r90; Top Overlay "2" at 1000,16 h39.37 r90; Top Overlay "1" at 1245,18 h39.37 r90